# Altium PCB apr_board.PcbDoc
Units mm, origin at the board's own origin, x right, y up, seen from the top; angles counter-clockwise.
Board outline 125 x 150 mm, 2 copper layers (Top Layer, Bottom Layer); 41 components, 61 nets, 171 pads, 24 vias.
Unrouted connection lines stored in the file: 1.
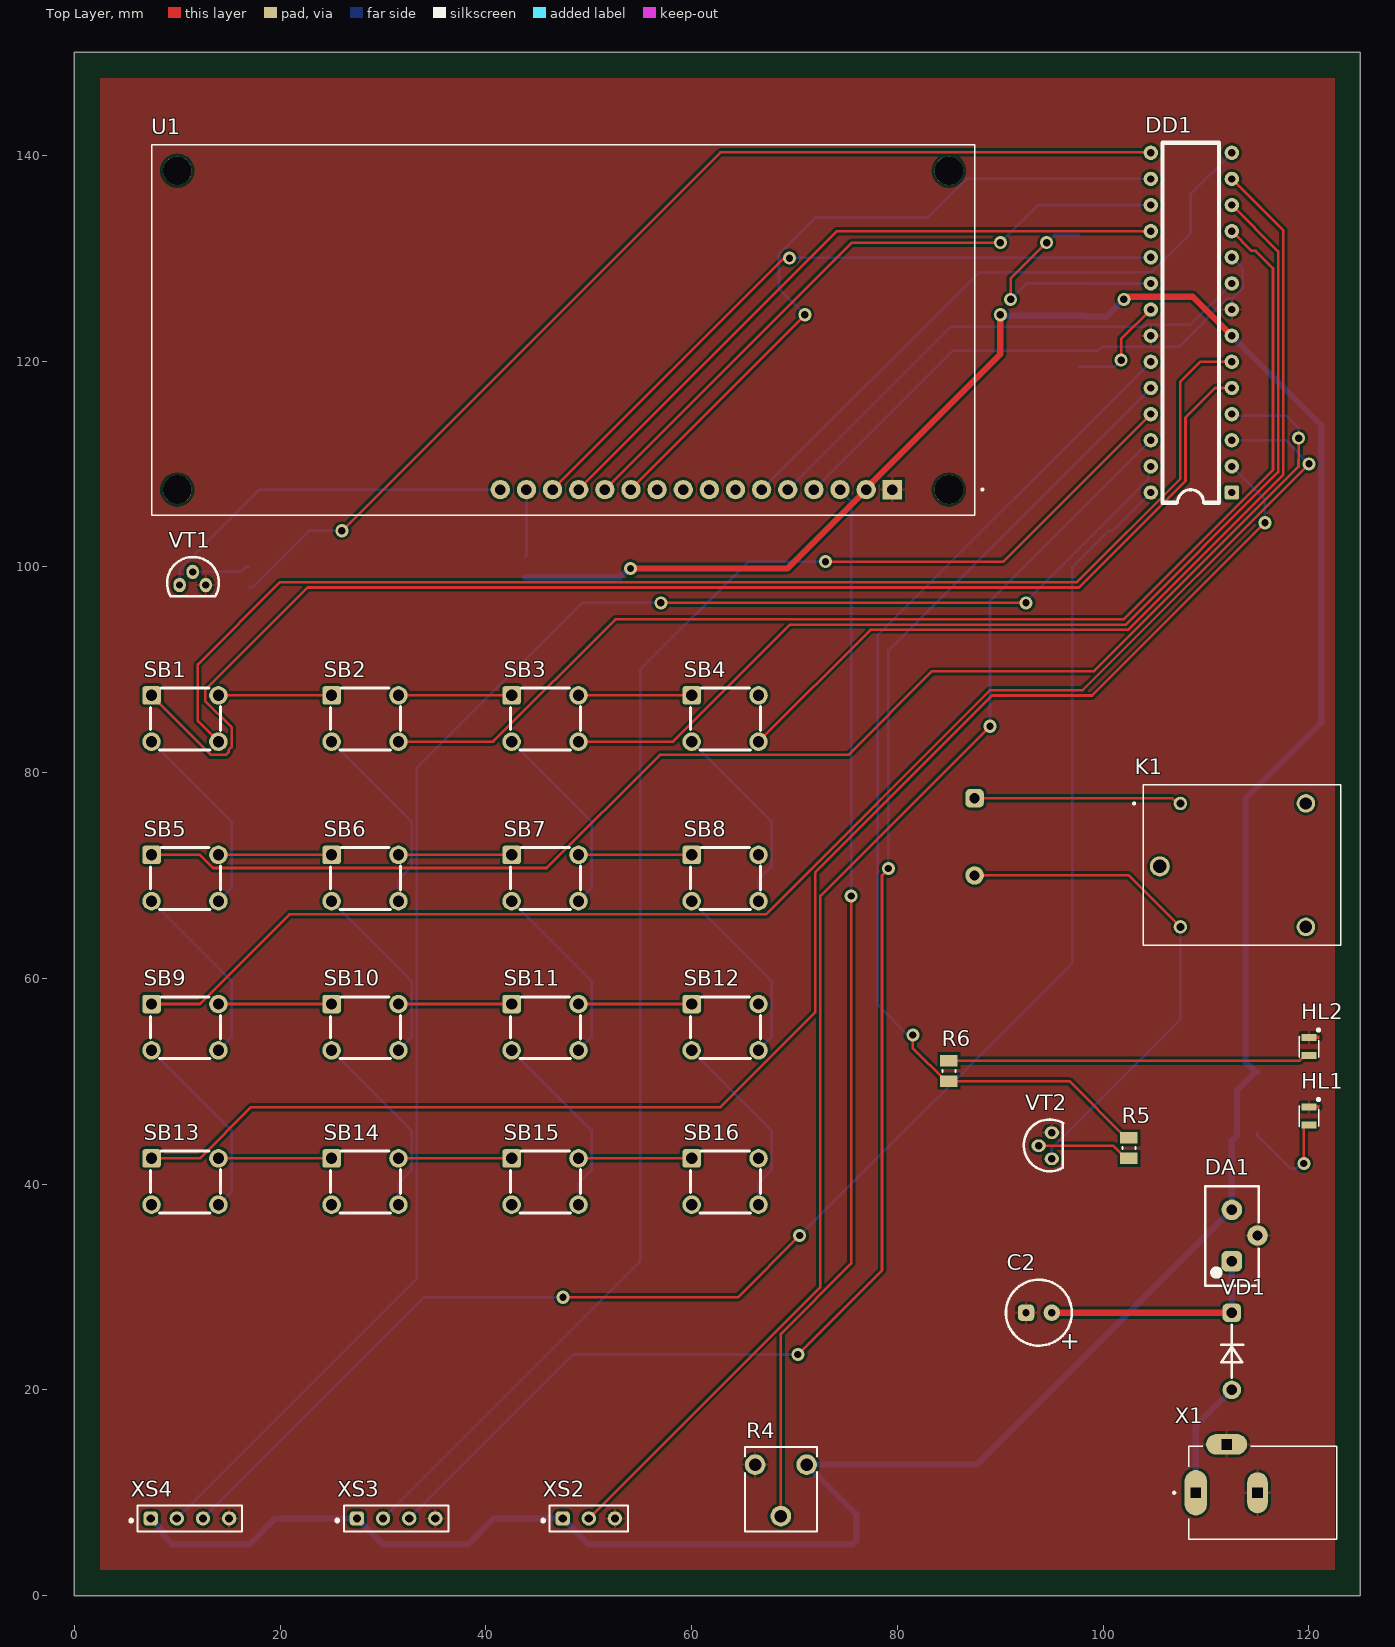
[diagram p0: Top Layer view]
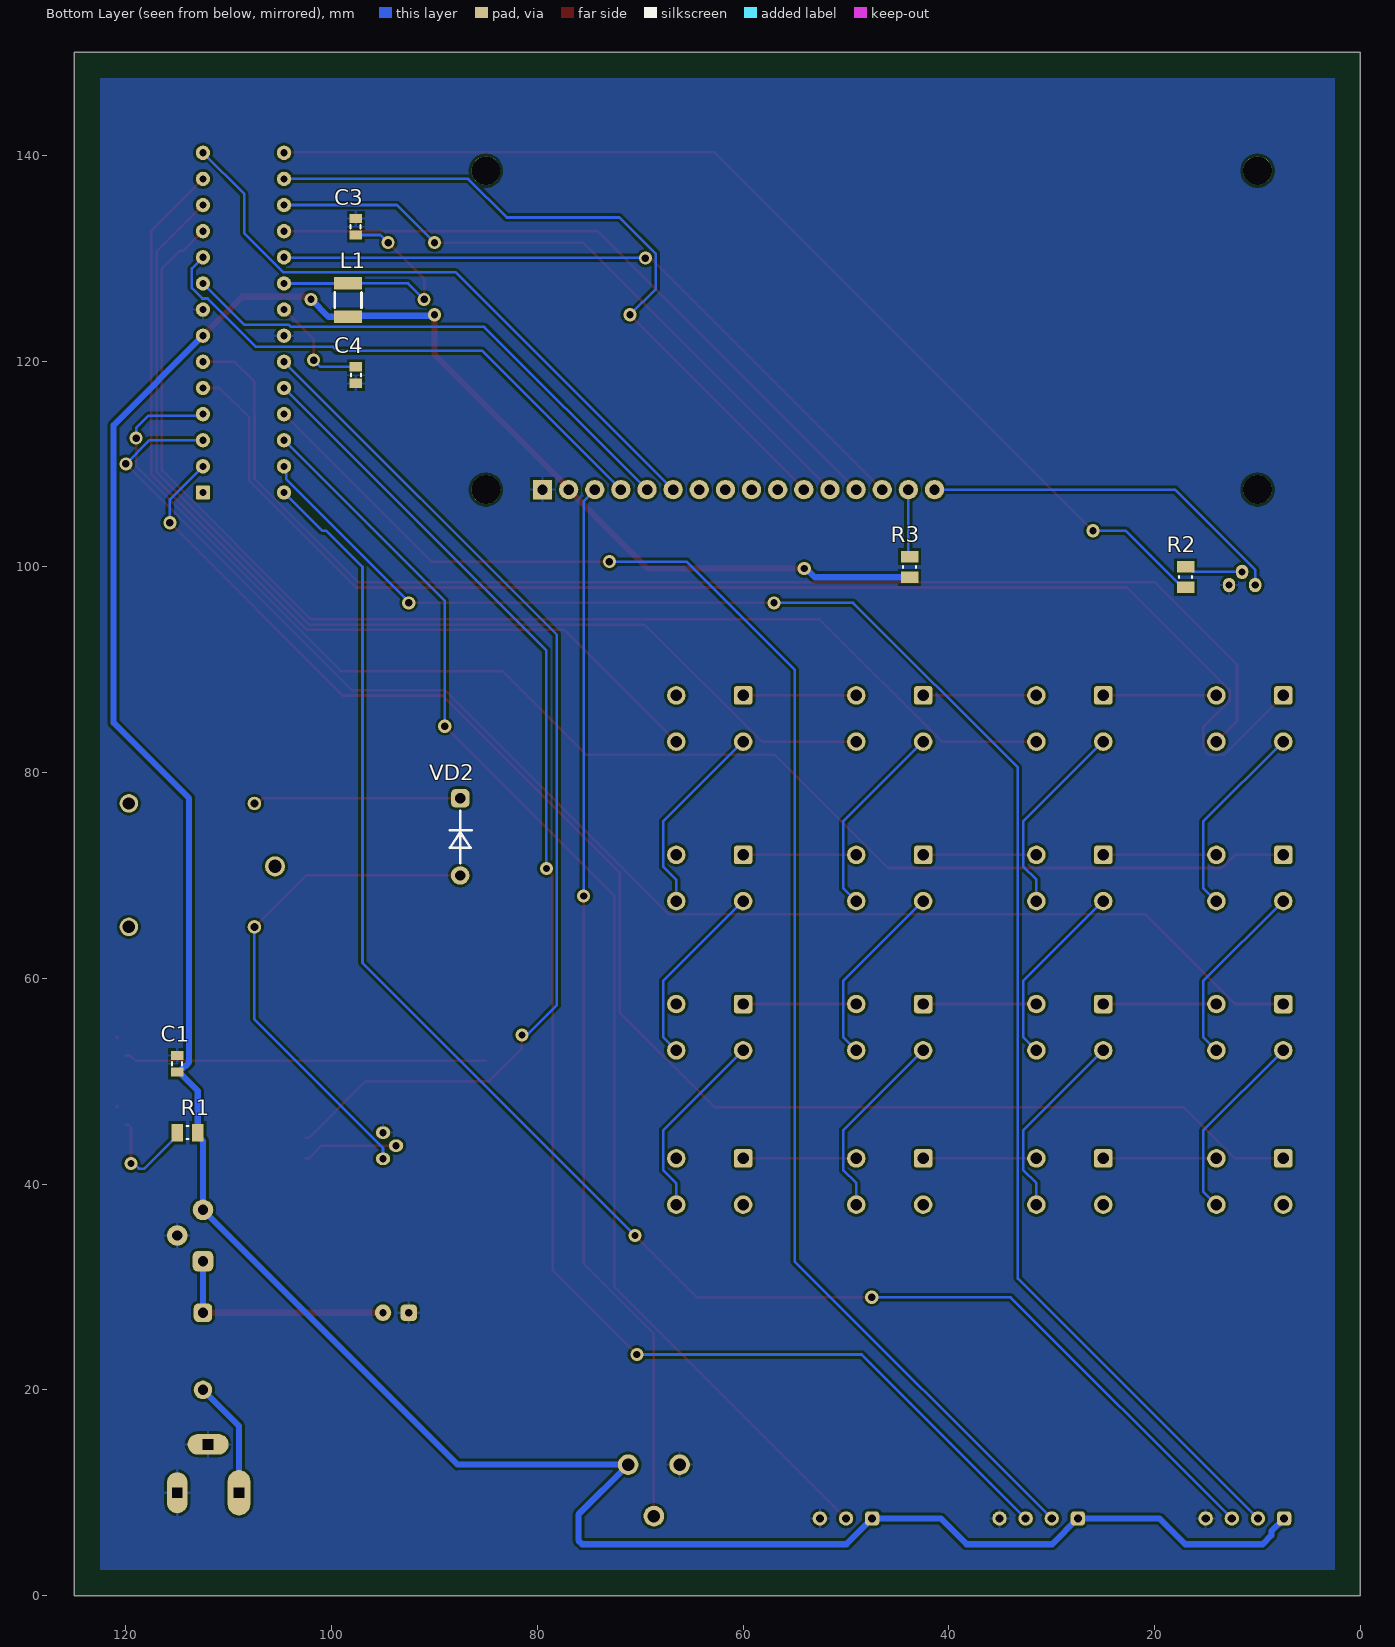
[diagram p1: Bottom Layer view, seen from below]
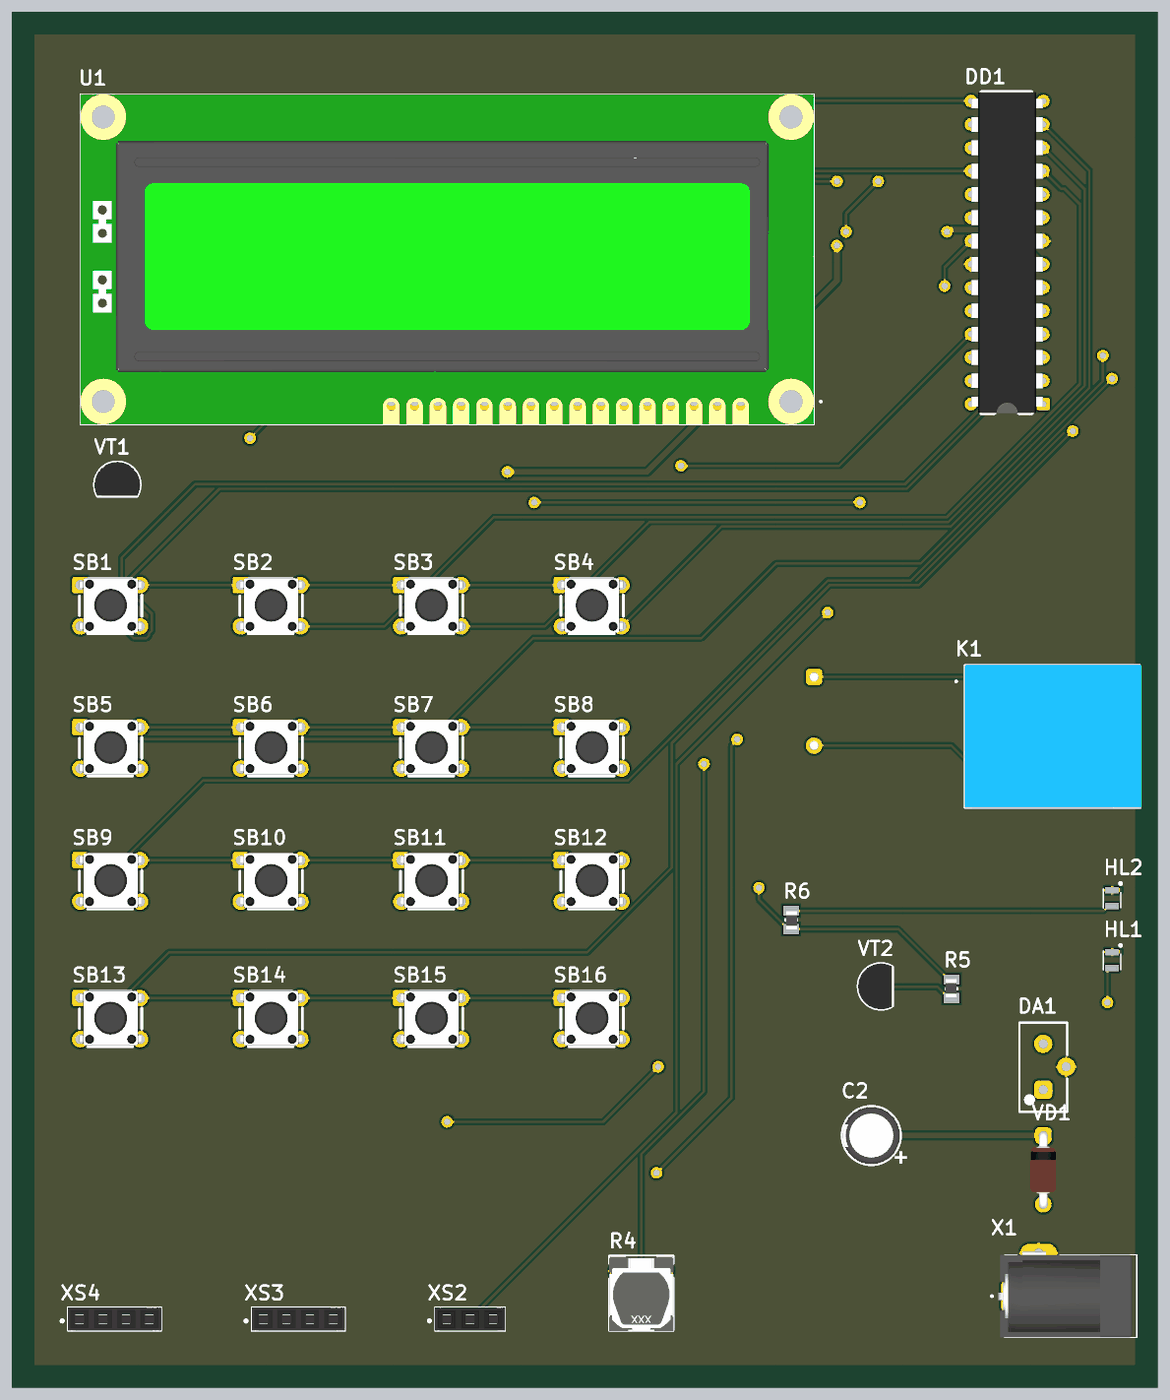
[diagram p2: 3D render of the assembled board from above, using the file's embedded part models]
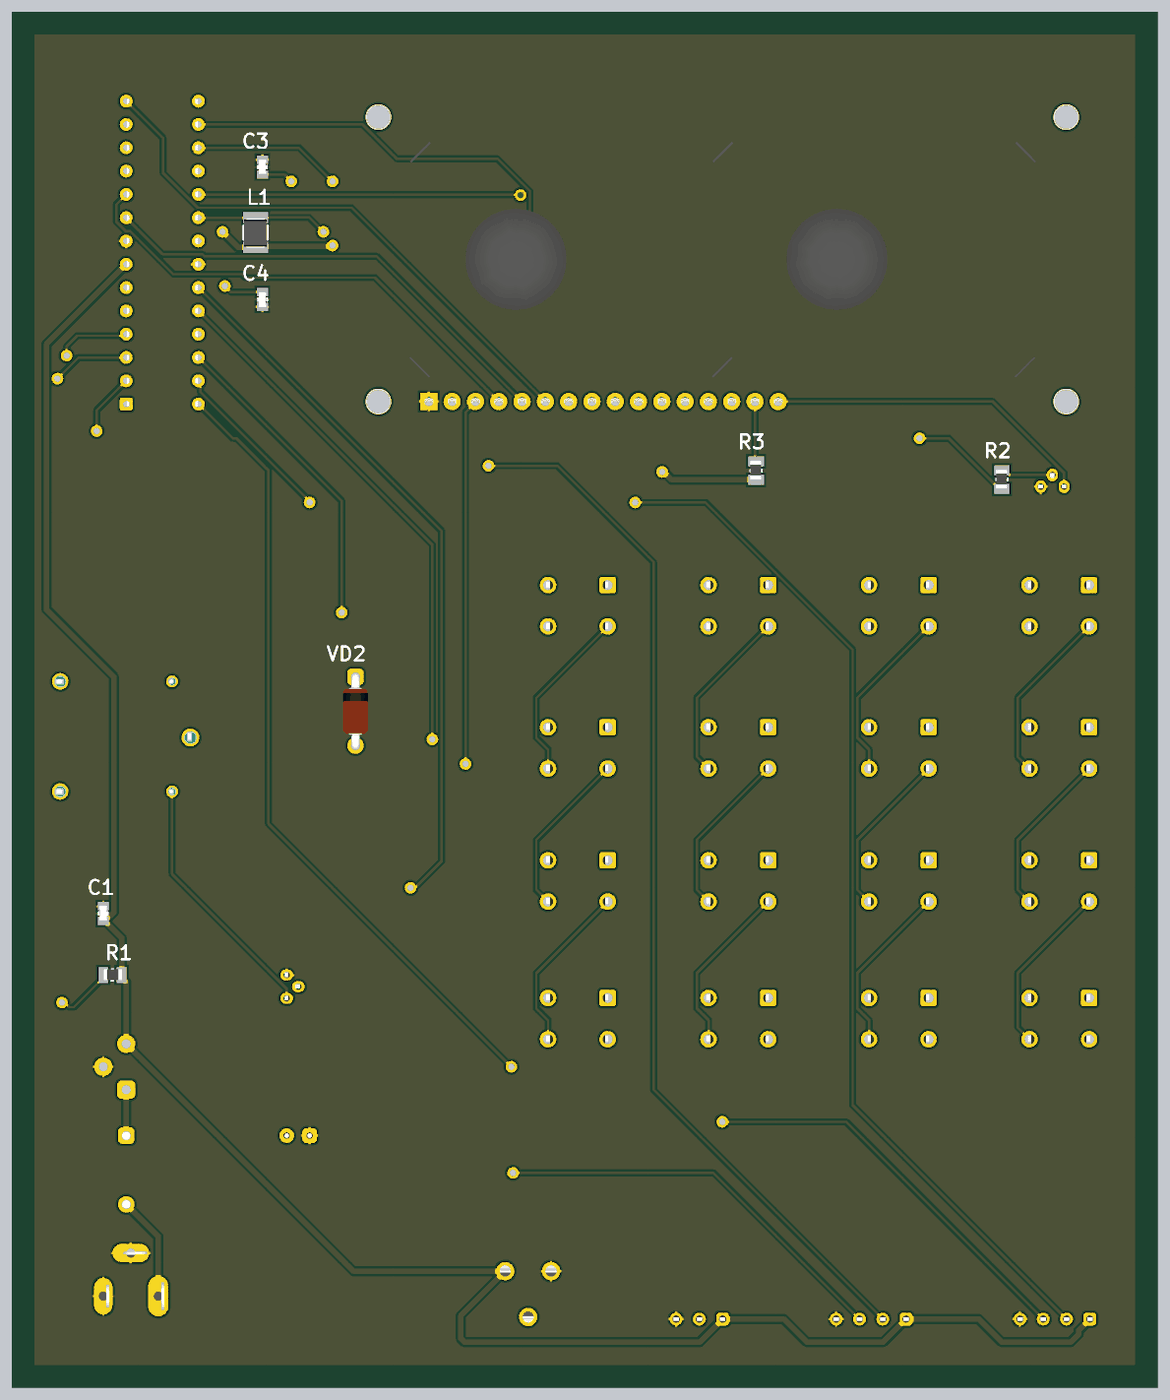
[diagram p3: 3D render of the assembled board from below, using the file's embedded part models]

## Layer stack, top to bottom
Top Solder: solder mask 0.0102, Solder Resist, Dk 3.5
Top Layer: signal copper 0.0356
Dielectric 1: dielectric 0.32, FR-4, Dk 4.8
Bottom Layer: signal copper 0.0356
Bottom Solder: solder mask 0.0102, Solder Resist, Dk 3.5

## Board outline
0,0 0,150 125,150 125,0

## Design rules (kind name [scope] priority, off if disabled: settings)
Clearance [All] p1: gap=0.254 ignorepadtopadclearanceinfootprint=FALSE
PolygonConnect [All] p1: connectstyle=Relief reliefconductorwidth=0.254 reliefentries=4 polygonreliefangle="90 Angle" airgapwidth=0.254
RoutingVias [All] p1: holewidth=0.711 width=1.27 viastyle="Through Hole" minholewidth=0.711 minwidth=1.27 maxholewidth=0.711 maxwidth=1.27
SolderMaskExpansion [All] p1: expansion=0.102 istentingtop=FALSE
SupplyNets "Schematic Supply Nets" [InNet('GND')] p1: voltage=0.000
Width [All] p1: maxlimit=0.6 minlimit=0.1 preferedwidth=0.254
30 further rules are at their usual default settings.

## Components (designator, comment, footprint, x,y, rotation, side; value= is the part's Value field where it differs from the comment)
C1 "100n" "CAP 0603 3D" 115,50.9 r0 bottom
C2 "C Al R" "capr- 2.5D6.5H12" 92.5,27.5 r180 top
C3 "100n" "CAP 0603 3D" 97.646,132.252 r0 bottom
C4 "100n" "CAP 0603 3D" 97.646,119.431 r180 bottom
DA1 "LM78xx" TO-220_В 112.5,32.5 r90 top
DD1 "ATmega8-16PU" "DIP-28  (300)" 112.5,107.22 r180 top
HL1 "fyls-0805???" "СД_SMD 2012_110" 120,47.5 r270 top
HL2 "fyls-0805???" "СД_SMD 2012_110" 120,54.25 r270 top
K1 "SRD-12VDC-SL-C" RELAY_SRD-12VDC-SL-C 113.6,71 r0 top
L1 "10u" B82422 98.396,127.559 r180 bottom
R1 "R" "Res_0805 3D" 115,45 r90 bottom
R2 "4k7" "Res_0805 3D" 17,98 r0 bottom
R3 "R" "Res_0805 3D" 43.818,98.978 r0 bottom
R4 "R POT" "POT SH-655MCL" 66.171,12.73 r0 top
R5 "4k7" "Res_0805 3D" 102.5,42.5 r180 top
R6 "R" "Res_0805 3D" 85,52 r0 top
SB1 "0670HIM" "250 _ 6,0-6,0-7,0" 7.5,87.5 r0 top
SB2 "0670HIM" "250 _ 6,0-6,0-7,0" 25,87.5 r0 top
SB3 "0670HIM" "250 _ 6,0-6,0-7,0" 42.5,87.5 r0 top
SB4 "0670HIM" "250 _ 6,0-6,0-7,0" 60,87.5 r0 top
SB5 "0670HIM" "250 _ 6,0-6,0-7,0" 7.5,72 r0 top
SB6 "0670HIM" "250 _ 6,0-6,0-7,0" 25,72 r0 top
SB7 "0670HIM" "250 _ 6,0-6,0-7,0" 42.5,72 r0 top
SB8 "0670HIM" "250 _ 6,0-6,0-7,0" 60,72 r0 top
SB9 "0670HIM" "250 _ 6,0-6,0-7,0" 7.5,57.5 r0 top
SB10 "0670HIM" "250 _ 6,0-6,0-7,0" 25,57.5 r0 top
SB11 "0670HIM" "250 _ 6,0-6,0-7,0" 42.5,57.5 r0 top
SB12 "0670HIM" "250 _ 6,0-6,0-7,0" 60,57.5 r0 top
SB13 "0670HIM" "250 _ 6,0-6,0-7,0" 7.5,42.5 r0 top
SB14 "0670HIM" "250 _ 6,0-6,0-7,0" 25,42.5 r0 top
SB15 "0670HIM" "250 _ 6,0-6,0-7,0" 42.5,42.5 r0 top
SB16 "0670HIM" "250 _ 6,0-6,0-7,0" 60,42.5 r0 top
U1 "LCD-16X2" MODULE_LCD-16X2 47.5,123 r180 top
VD1 "1N4007" "DO-41  (7.5)" 112.5,20 r90 top
VD2 "1N4007" "DO-41  (7.5)" 87.5,70 r90 bottom
VT1 "VT NPN" "КТ-26 КБЭ (2)" 10.23,98.23 r0 top
VT2 "VT NPN" "КТ-26 КБЭ (2)" 95,42.46 r90 top
X1 "Гнездо" XKB_DC-005-5A-2.0 115,10 r180 top
XS2 "ADC" DS1023-1*03 47.46,7.5 r0 top
XS3 "J2" DS1023-1*04 27.46,7.5 r0 top
XS4 "I2C" DS1023-1*04 7.42,7.5 r0 top

## Footprints (in the part's own frame and the unit in brackets; to place one, negate y for a bottom-side part, rotate by r counter-clockwise, add the part's x,y. Pads: shape width x height; smd on the part's side, far side on the other; paste and mask are expansions set on the pad)
"250 _ 6,0-6,0-7,0" [mm]
  rrect30% 1.8x1.8 hole 1.1: 1(0,0)
  round 1.8 hole 1.1: 2(6.5,0) 3(0,-4.5) 4(6.5,-4.5)
  silkscreen extent -0.1,-5.3 6.7,0.7, body extent -0.1,-5.2 6.7,0.8, height 7
B82422 [mm] "Индуктивность  EPCOS / TDK"
  rect 2.7x1.2 smd: 1(0,0) 2(0,-3.25)
  silkscreen extent -1.3,-2.4 1.3,-0.9, body extent -1.25,-3.29 1.25,-0.11, height 2.1
"CAP 0603 3D" [mm] "Конденсатор керамический ЧИП (SMD)"
  rect 1.2x0.9 smd: 1(0,0) 2(0,-1.6)
  silkscreen extent -0.48,-0.95 0.5,-0.65, body extent -0.4,-1.65 0.4,-0.05, height 0.86
"capr- 2.5D6.5H12" [mm] "Конденсатор электролитический алюминиевый"
  rrect50% 1.6x1.6 hole 0.7: 1(0,0)
  round 1.6 hole 0.7: 2(-2.5,0)
  silkscreen extent -4.45,-3.2 1.95,3.2, body extent -4.4,-3.15 1.9,3.15, height 11.5
"DIP-28  (300)" [mm]
  rrect30% 1.4x1.4 hole 0.7: 1(0,0)
  round 1.4 hole 0.7: 2(0,-2.54) 3(0,-5.08) 4(0,-7.62) 5(0,-10.16) 6(0,-12.7) 7(0,-15.24) 8(0,-17.78) 9(0,-20.32) 10(0,-22.86) 11(0,-25.4) 12(0,-27.94) 13(0,-30.48) 14(0,-33.02) 15(7.874,-33.02) 16(7.874,-30.48) 17(7.874,-27.94) 18(7.874,-25.4) 19(7.874,-22.86) 20(7.874,-20.32) 21(7.874,-17.78) 22(7.874,-15.24) 23(7.874,-12.7) 24(7.874,-10.16) 25(7.874,-7.62) 26(7.874,-5.08) 27(7.874,-2.54) 28(7.874,0)
  silkscreen extent 1.25,-34 6.75,1, body extent 0.03,-34.01 7.84,0.99, height 4.4
"DO-41  (7.5)" [mm]
  rrect50% 1.8x1.8 hole 1: 1(7.5,0)
  round 1.8 hole 1: 2(0,0)
  silkscreen extent 1.2,-1.1 6.3,1, body extent -0.45,-1.35 7.95,1.35, height 2.7
DS1023-1*03 [mm] "Connfly"
  rrect50% 1.4x1.4 hole 0.8: 1(0,0)
  round 1.4 hole 0.8: 2(2.54,0) 3(5.08,0)
  silkscreen extent -2.05,-1.27 6.35,1.27, body extent -1.27,-1.27 6.35,1.27, height 8.5
DS1023-1*04 [mm] "Connfly"
  rrect50% 1.4x1.4 hole 0.8: 1(0,0)
  round 1.4 hole 0.8: 2(2.54,0) 3(5.08,0) 4(7.62,0)
  silkscreen extent -2.05,-1.27 8.89,1.27, body extent -1.27,-1.27 8.89,1.27, height 8.5
MODULE_LCD-16X2 [mm]
  rect 1.88x1.88 / inner round 1.88 / far side rect 1.88x1.88 hole 1.016: 1(-32,15.5)
  round 1.88 hole 1.016: 2(-29.46,15.5) 3(-26.92,15.5) 4(-24.38,15.5) 5(-21.84,15.5) 6(-19.3,15.5) 7(-16.76,15.5) 8(-14.22,15.5) 9(-11.68,15.5) 10(-9.14,15.5) 11(-6.6,15.5) 12(-4.06,15.5) 13(-1.52,15.5) 14(1.02,15.5) 15(3.56,15.5) 16(6.1,15.5)
  round 2.8 hole 2.8 unplated: ""(-37.5,-15.5) ""(-37.5,15.5) ""(37.5,-15.5) ""(37.5,15.5)
  silkscreen extent -40.85,-18 40,18, body extent -40,-18 40,18, height 10.2
"POT SH-655MCL" [mm] "Резистор подстроечный (Song Huei)"
  round 2 hole 1.2: 1(0,0) 2(2.5,-5) 3(5,0)
  silkscreen extent -1,-6.5 6,1.7, body extent -1.02,-6.55 6,1.75, height 8.1
RELAY_SRD-12VDC-SL-C [mm]
  round 1.308 hole 0.8: COIL1(-6.1,6) COIL2(-6.1,-6)
  round 1.95 hole 1.3: COM(-8.1,-0.12)
  round 1.8 hole 1.2: NC(6.1,6) NO(6.1,-6)
  silkscreen extent -10.7,-7.8 9.5,7.8, body extent -9.6,-7.8 9.6,7.8, height 15.8
"Res_0805 3D" [mm] "Резистор ЧИП (SMD)"
  rect 1.7x1.1 smd: 1(0,0) 2(0,-2)
  silkscreen extent -0.63,-1.1 0.63,-0.9, body extent -0.55,-2.05 0.65,-0.05, height 0.5
TO-220_В [mm] "КТ-28-2"
  rrect50% 2x2 hole 1: 1(0,0)
  round 2 hole 1: 2(2.5,-2.5) 3(5,0)
  silkscreen extent -2.4,-2.6 7.3,2.6, body extent -2.5,-2.75 7.51,2.76, height 26
XKB_DC-005-5A-2.0 [mm]
  oval 2.2x4.4 hole 1 square: 1(6,0)
  oval 2x4 hole 1 square: 2(0,0)
  oval 4x2 hole 1 square: 3(3,-4.7)
  silkscreen extent -7.7,-4.5 8.2,4.5, body extent -7.2,-4.85 7.4,4.5, height 11
"КТ-26 КБЭ (2)" [mm]
  oval 1.2x1.4 hole 0.7: 1(1.27,1.27) 2(0,0) 3(2.54,0)
  silkscreen extent -1.22,-1.1 3.82,2.71, body extent -1.2,-1 3.8,2.7, height 11
"СД_SMD 2012_110" [mm]
  rrect10% 0.7x1.5 smd: 1(0,0) 2(1.75,0)
  Top Layer region: -0.2,0.7 0.15,0.7 0.15,1.025 -0.2,1.025
  silkscreen extent -0.86,-0.95 1.92,1.06, body extent -0.12,-0.62 1.88,0.63, height 1.1

## Part data
C1 C3 C4: library part C, "Конденсатор керамика"
C2: "Конденсатор алюминиевый радиальный"
DA1: "Регулируемый стабилизатор напряжения     5…15V"
DD1: "Микроконтроллер 8-Бит   AVR   16МГц   8КБ Flash [DIP-28]"
HL1 HL2: library part fyls-0805...., "Св. д. ЧИП 2012 (0805)"
K1: "General Purpose Non Latching 12VDC SPDT Through Hole Relays RoHS", Package="NON STANDARD-5 Songle Relay", Check_prices=https://www.snapeda.com/parts/SRD-12VDC-SL-C/Songle+Relay/view-part/?ref=eda, MF="Songle Relay", MP=SRD-12VDC-SL-C, SnapEDA_Link=https://www.snapeda.com/parts/SRD-12VDC-SL-C/Songle+Relay/view-part/?ref=snap
L1: library part "L x1", "Индуктивность ЧИП (SMD)"
R1 R3 R6: "Резисторы плёночные (SMD; МЛТ; С2-33Н; MP9xxx)"
R2 R5: library part R, "Резисторы плёночные (SMD; МЛТ; С2-33Н; MP9xxx)"
R4: "Потенциометр BOURNS"
SB1 SB2 SB3 SB4 SB5 SB6 SB7 SB8 SB9 SB10 SB11 SB12 SB13 SB14 SB15 SB16: library part 1_0670HIM, "Кнопка тактовая"
U1: "Display Development Tools 16x2 Black on Green Char LCD w Backlight", Package=None, Check_prices=https://www.snapeda.com/parts/LCD-16X2/Gravitech/view-part/?ref=eda, MF=Gravitech, MP=LCD-16X2, SnapEDA_Link=https://www.snapeda.com/parts/LCD-16X2/Gravitech/view-part/?ref=snap
VD1 VD2: library part "Диод.  x1  (2)", "Диод  одиночный"
VT1 VT2: "Транзистор NPN"
X1: library part "Гнездо с выкл.", "Разъём питания"
XS2: library part "Розет 1* 3  (2)", "Гнездо на плату 2.54мм 1х3 pin"
XS3 XS4: library part "Розет 1* 4  (2)", "Гнездо на плату 2.54мм 1х4 pin"

## Via types
v1: diameter 1.27, hole 0.711, Top Layer to Bottom Layer, 24 vias

## Nets (pads, with @x,y where several pads share a name; then routed paths per layer and width w, separated by ;. In a path a pad name is that pad's centre, name@x,y a point inside that pad or via, vN(x,y) a via of type N, cw(c..) or ccw(c..) an arc to the next point about the centre after c; other vN are vias at no path point)
+5В: C1.1 DA1.3 DD1.7 L1.2 R1.2 R3.1 R4.3 U1.2 XS2.1 XS3.1 XS4.1 | length 312.3
  Top Layer w0.6: v1(54.056,99.83) 69.29,99.83 U1.2 76.96,107.623 90,120.663 v1(90,124.5) ; v1(102,126) 102.181,126 102.435,126.254 108.706,126.254 DD1.7
  Bottom Layer w0.6: XS4.1 7.42,7.481 8.645,6.257 8.645,5.855 9.5,5 17.032,5 19.532,7.5 XS3.1 29.96,5 38.282,5 40.782,7.5 XS2.1 49.96,5 75.649,5 76,5.351 76,7.901 R4.3 87.73,12.73 DA1.3 112.5,44.2 113,44.7 R1.2 113,49.05 C1.1@114.85,50.9 ; R3.1 53.023,98.978 53.875,99.83 v1(54.056,99.83) ; v1(90,124.5) 90.095,124.405 98.3,124.405 L1.2 100.309,124.309 v1(102,126) ; DD1.7 121.189,113.771 121.189,84.828 113.846,77.485 113.846,51.821 114.192,51.474 114.276,51.474 C1.1@114.85,50.9 ; C1.1 C1.1@114.85,50.9
+12В: VD1.2 X1.1 | length 11.4
  Bottom Layer w0.6: X1.1 109,16.5 VD1.2
GND: C1.2 C2.1 C3.2 C4.2 DA1.2 DD1.8 DD1.22 HL1.1 HL2.1 R4.1 U1.1 VT1.3 VT2.3 X1.2 X1.3 XS2.3 XS3.4 XS4.4
NetC2_2: C2.2 DA1.1 VD1.1 | length 22.5
  Top Layer w0.6: C2.2 VD1.1
  Bottom Layer w0.6: VD1.1 DA1.1
NetC3_1: C3.1 DD1.20 L1.1 | length 24.7
  Top Layer w0.254: v1(91,126) 91,128 v1(94.5,131.5)
  Bottom Layer w0.254: v1(91,126) 92.559,127.559 L1.1 98.415,127.54 DD1.20 ; v1(94.5,131.5) 95.252,132.252 C3.1
NetC4_1: C4.1 DD1.21 | length 10.5
  Top Layer w0.254: v1(101.746,120.09) 101.746,122.12 DD1.21
  Bottom Layer w0.254: C4.1 101.087,119.431 v1(101.746,120.09)
NetDD1_2: DD1.2 SB13.1 | length 148.6
  Top Layer w0.254: SB13.1 12.188,42.5 17.173,47.485 62.796,47.485 72,56.688 72,70.282 89.207,87.489 98.926,87.489 v1(115.718,104.282)
  Bottom Layer w0.254: DD1.2 115.718,106.542 v1(115.718,104.282)
NetDD1_3: DD1.3 SB9.1 | length 142.7
  Top Layer w0.254: SB9.1 12.188,57.5 20.907,66.219 67.219,66.219 89,88 98,88 v1(120,110)
  Bottom Layer w0.254: DD1.3 117.7,112.3 v1(120,110)
NetDD1_4: DD1.4 SB5.1 | length 139
  Top Layer w0.254: SB5.1 12.188,72 13.469,70.719 45.907,70.719 56.907,81.719 75.232,81.719 83.364,89.851 99.102,89.851 118.984,109.733 118.984,110.421 119,110.437 v1(119,112.5)
  Bottom Layer w0.254: DD1.4 112.67,114.67 117.83,114.67 119,113.5 v1(119,112.5)
NetDD1_5: DD1.5 SB1.1 | length 132.8
  Top Layer w0.254: SB1.1 13.281,81.719 14.719,81.719 15,82 15,82.188 15.281,82.469 15.281,84.407 12.719,86.969 12.719,88.031 22.68,97.992 97.645,97.992 108,108.347 108,114.5 110.88,117.38 DD1.5
NetDD1_6: DD1.6 SB1.4 | length 126.5
  Top Layer w0.254: SB1.4 12,85 12,90.5 20,98.5 97.435,98.5 107.492,108.557 107.492,114.71 107.5,114.718 107.5,118 109.42,119.92 DD1.6
NetDD1_9: DD1.9 U1.5 | length 51.5
  Bottom Layer w0.254: U1.5 85.168,123.328 103.965,123.328 104.178,123.541 108.501,123.541 DD1.9
NetDD1_10: DD1.10 U1.4 | length 53.3
  Bottom Layer w0.254: U1.4 85.38,121 99.486,121 99.865,121.379 107.35,121.379 112.052,126.081 112.57,126.081 113.581,127.092 113.581,128.999 DD1.10
NetDD1_11: DD1.11 SB2.4 | length 121
  Top Layer w0.254: SB2.4 40.688,83 52.579,94.891 101.986,94.891 116.5,109.404 116.5,129 114.8,130.7 114.42,130.7 DD1.11
NetDD1_12: DD1.12 SB3.4 | length 106.7
  Top Layer w0.254: SB3.4 58.188,83 69.571,94.383 102.197,94.383 117.008,109.194 117.008,130.652 DD1.12
NetDD1_13: DD1.13 SB4.4 | length 92.6
  Top Layer w0.254: SB4.4 77.375,93.875 102.407,93.875 117.516,108.983 117.516,132.684 DD1.13
NetDD1_14: DD1.14 U1.6 | length 61.5
  Bottom Layer w0.254: U1.6 87.921,128.621 104.696,128.621 108.488,132.413 108.488,136.228 DD1.14
NetDD1_15: DD1.15 R2.1 | length 105.2
  Top Layer w0.254: v1(26,103.5) 62.781,140.281 104.585,140.281 DD1.15
  Bottom Layer w0.254: R2.1 17.3,98 22.8,103.5 v1(26,103.5)
NetDD1_16: DD1.16 U1.11 | length 70.1
  Top Layer w0.254: U1.11 54.1,107.55 71,124.45 v1(71,124.5)
  Bottom Layer w0.254: v1(71,124.5) 68.484,127.016 68.484,130.421 72.014,133.951 82.969,133.951 86.719,137.7 DD1.16
NetDD1_17: DD1.17 U1.12 | length 64.5
  Top Layer w0.254: U1.12 75.56,131.5 v1(90,131.5)
  Bottom Layer w0.254: v1(90,131.5) 93.66,135.16 DD1.17
NetDD1_18: DD1.18 U1.13 | length 66
  Top Layer w0.254: U1.13 74.14,132.62 DD1.18
NetDD1_19: DD1.19 U1.14 | length 67.5
  Top Layer w0.254: U1.14 68.98,130 v1(69.5,130)
  Bottom Layer w0.254: v1(69.5,130) 69.54,130.04 104.586,130.04 DD1.19
NetDD1_23: DD1.23 R5.2 R6.2 | length 104
  Top Layer w0.254: v1(81.5,54.5) 81.5,53.2 84.7,50 R6.2 96.7,50 102.2,44.5 R5.2
  Bottom Layer w0.254: v1(81.5,54.5) 81,54.5 78.101,57.399 78.101,93.395 DD1.23
NetDD1_24: DD1.24 XS3.3 | length 152.5
  Top Layer w0.254: v1(70.324,23.434) 78.5,31.61 78.5,70 79.117,70.617 v1(79.117,70.684)
  Bottom Layer w0.254: XS3.3 48.474,23.434 v1(70.324,23.434) ; v1(79.117,70.684) 79.117,91.871 DD1.24
NetDD1_25: DD1.25 XS3.2 | length 152.8
  Top Layer w0.254: v1(73,100.5) 90.286,100.5 DD1.25
  Bottom Layer w0.254: XS3.2 55,32.5 55,90 65.5,100.5 v1(73,100.5)
NetDD1_26: DD1.26 XS2.2 | length 127.4
  Top Layer w0.254: XS2.2 72.508,30.008 72.508,68.008 v1(89,84.5)
  Bottom Layer w0.254: v1(89,84.5) 89,96.674 DD1.26
NetDD1_27: DD1.27 XS4.2 | length 166.8
  Top Layer w0.254: v1(57,96.5) v1(92.5,96.5)
  Bottom Layer w0.254: XS4.2 33.289,30.829 33.289,80.47 49.319,96.5 v1(57,96.5) ; v1(92.5,96.5) 92.5,96.623 104.407,108.529 104.407,109.541 DD1.27
NetDD1_28: DD1.28 XS4.3 | length 156
  Top Layer w0.254: v1(47.5,29) 64.5,29 v1(70.5,35)
  Bottom Layer w0.254: XS4.3 34,29 v1(47.5,29) ; v1(70.5,35) 97,61.5 97,100 100.5,103.5 100.906,103.5 DD1.28
NetHL1_2: HL1.2 R1.1 | length 10.5
  Top Layer w0.254: v1(119.5,42) 119.5,45.527 119.723,45.75 HL1.2
  Bottom Layer w0.254: R1.1 115,44.7 118.2,41.5 118.725,41.5 119.225,42 v1(119.5,42)
NetHL2_2: HL2.2 R6.1 | length 35.2
  Top Layer w0.254: R6.1 119.1,52 119.6,52.5 HL2.2
NetK1_COIL1: K1.COIL1 VD2.1 | length 20.2
  Top Layer w0.254: VD2.1 106.715,77.5 107.215,77 K1.COIL1
NetK1_COIL2: K1.COIL2 VD2.2 VT2.2 | length 49.8
  Top Layer w0.254: VD2.2 102.5,70 K1.COIL2
  Bottom Layer w0.254: VT2.2 95,43.513 107.5,56.013 K1.COIL2
NetR2_2: R2.2 VT1.1 | length 5.7
  Bottom Layer w0.254: VT1.1 16.2,99.5 16.7,100 R2.2
NetR3_2: R3.2 U1.15 | length 6.6
  Bottom Layer w0.254: R3.2 43.94,101.1 U1.15
NetR4_2: R4.2 U1.3 | length 103
  Top Layer w0.254: R4.2 68.671,25.452 75.5,32.282 v1(75.5,68)
  Bottom Layer w0.254: U1.3 74.42,107.403 75.5,106.323 v1(75.5,68)
NetR5_1: R5.1 VT2.1 | length 9.3
  Top Layer w0.254: VT2.1 100.97,43.73 102.2,42.5 R5.1
NetSB1_2: SB1.2 SB2.1
NetSB1_3: SB1.3 SB5.4 | length 19.3
  Bottom Layer w0.254: SB1.3 15.281,75.219 15.281,68.781 SB5.4
NetSB2_2: SB2.2 SB3.1 | length 11
  Top Layer w0.254: SB2.2 SB3.1
NetSB2_3: SB2.3 SB6.4 | length 19.3
  Bottom Layer w0.254: SB2.3 32.781,75.219 32.781,70.865 31.5,69.584 SB6.4
NetSB3_2: SB3.2 SB4.1 | length 11
  Top Layer w0.254: SB3.2 SB4.1
NetSB3_3: SB3.3 SB7.4 | length 19.3
  Bottom Layer w0.254: SB3.3 50.281,75.219 50.281,68.781 SB7.4
NetSB4_3: SB4.3 SB8.4 | length 19.3
  Bottom Layer w0.254: SB4.3 67.781,75.219 67.781,70.865 66.5,69.584 SB8.4
NetSB5_2: SB5.2 SB6.1 | length 11
  Top Layer w0.254: SB5.2 SB6.1
NetSB5_3: SB5.3 SB9.4 | length 18.3
  Bottom Layer w0.254: SB5.3 15.281,59.719 15.281,54.281 SB9.4
NetSB6_2: SB6.2 SB7.1 | length 11
  Top Layer w0.254: SB6.2 SB7.1
NetSB6_3: SB6.3 SB10.4 | length 18.3
  Bottom Layer w0.254: SB6.3 32.781,59.719 32.781,54.281 SB10.4
NetSB7_2: SB7.2 SB8.1 | length 11
  Top Layer w0.254: SB7.2 SB8.1
NetSB7_3: SB7.3 SB11.4 | length 18.3
  Bottom Layer w0.254: SB7.3 50.281,59.719 50.281,54.281 SB11.4
NetSB8_3: SB8.3 SB12.4 | length 18.3
  Bottom Layer w0.254: SB8.3 67.781,59.719 67.781,54.281 SB12.4
NetSB9_2: SB9.2 SB10.1 | length 11
  Top Layer w0.254: SB9.2 SB10.1
NetSB9_3: SB9.3 SB13.4 | length 18.8
  Bottom Layer w0.254: SB9.3 15.281,45.219 15.281,39.281 SB13.4
NetSB10_2: SB10.2 SB11.1 | length 11
  Top Layer w0.254: SB10.2 SB11.1
NetSB10_3: SB10.3 SB14.4 | length 18.8
  Bottom Layer w0.254: SB10.3 32.781,45.219 32.781,41.365 31.5,40.084 SB14.4
NetSB11_2: SB11.2 SB12.1 | length 11
  Top Layer w0.254: SB11.2 SB12.1
NetSB11_3: SB11.3 SB15.4 | length 18.8
  Bottom Layer w0.254: SB11.3 50.281,45.219 50.281,41.365 49,40.084 SB15.4
NetSB12_3: SB12.3 SB16.4 | length 18.8
  Bottom Layer w0.254: SB12.3 67.781,45.219 67.781,41.365 66.5,40.084 SB16.4
NetSB13_2: SB13.2 SB14.1 | length 11
  Top Layer w0.254: SB13.2 SB14.1
NetSB14_2: SB14.2 SB15.1 | length 11
  Top Layer w0.254: SB14.2 SB15.1
NetSB15_2: SB15.2 SB16.1 | length 11
  Top Layer w0.254: SB15.2 SB16.1
NetU1_16: U1.16 VT1.2 | length 35.9
  Bottom Layer w0.254: VT1.2 10.23,99.717 18.013,107.5 U1.16
pads on no net: DD1.1 K1.COM K1.NC K1.NO SB4.2 SB8.2 SB12.2 SB13.3 SB14.3 SB15.3 SB16.2 SB16.3 U1. U1.7 U1.8 U1.9 U1.10
copper on no net: | length 11
  Top Layer w0.254: 14,87.5 25,87.5

## Polygon pours and split planes (outlines as drawn)
GND on Top Layer "GND_L01_P000" (solid, pour order 0): 2.5,147.5 122.5,147.5 122.5,2.5 2.5,2.5
GND on Bottom Layer "GND_L02_P001" (solid, pour order 1): 2.5,147.5 122.5,147.5 122.5,2.5 2.5,2.5

## Silkscreen, mask and mechanical layers (free items; w line width, h text height)
Mechanical 1:
  the board outline again, w0.254

## Text inside footprints (layer, text, board x,y; h text height)
C2: Top Overlay "+" at 97.75,26 h3 r180; Top Assembly "+" at 96.25,27 h3 r180